# Altium PCB PCB1.PcbDoc
Units mil, origin at the board's own origin, x right, y up, seen from the top; angles counter-clockwise.
Board outline 1970 x 885 mil, 2 copper layers (Top Layer, Bottom Layer); 18 components, 17 nets, 64 pads, 0 vias.
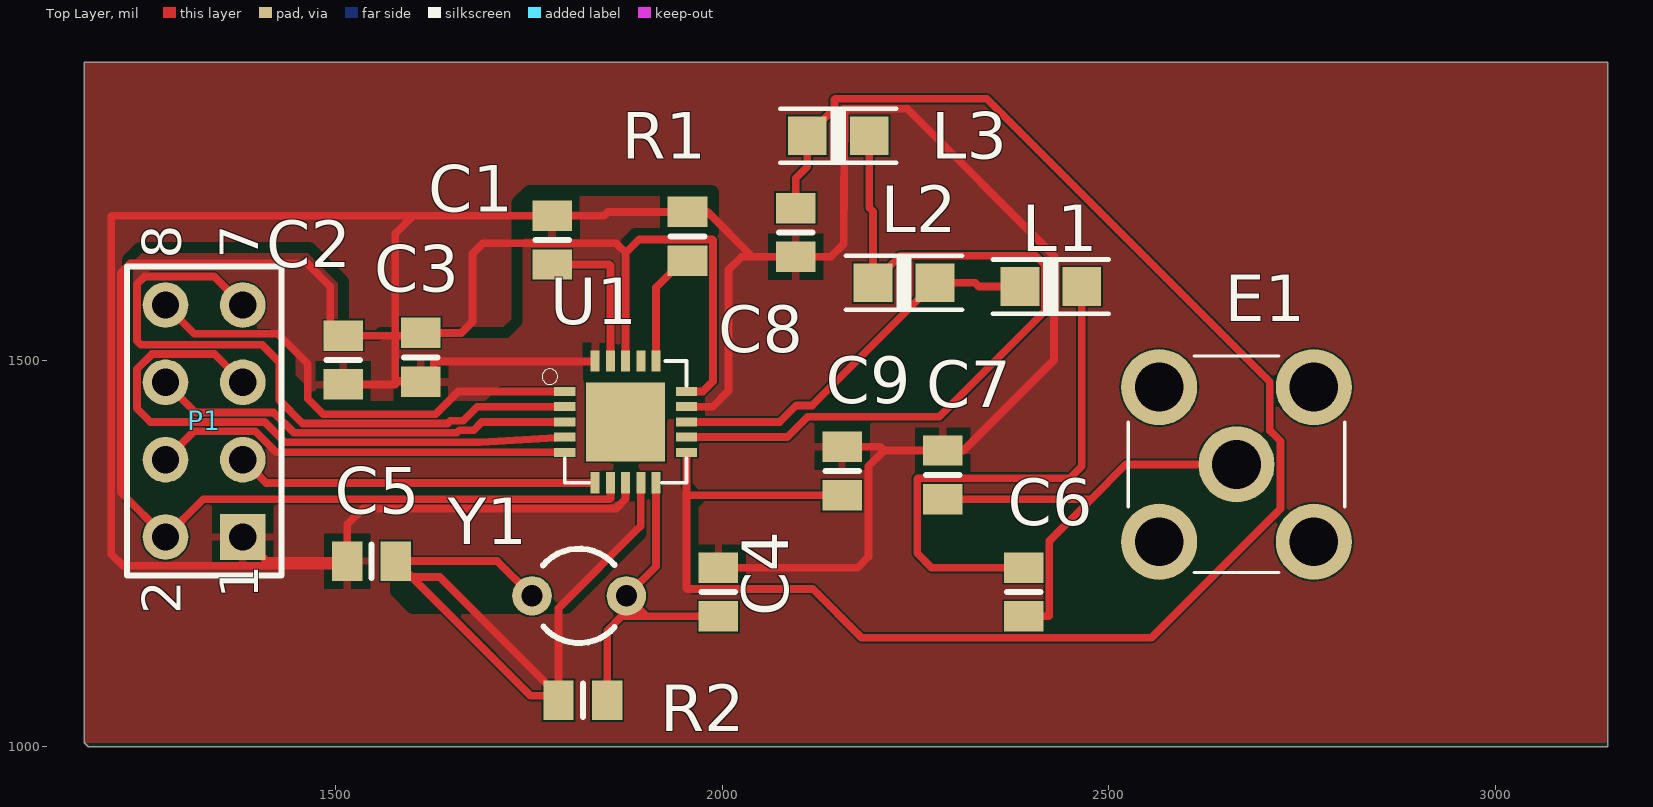
[diagram p0: Top Layer view]
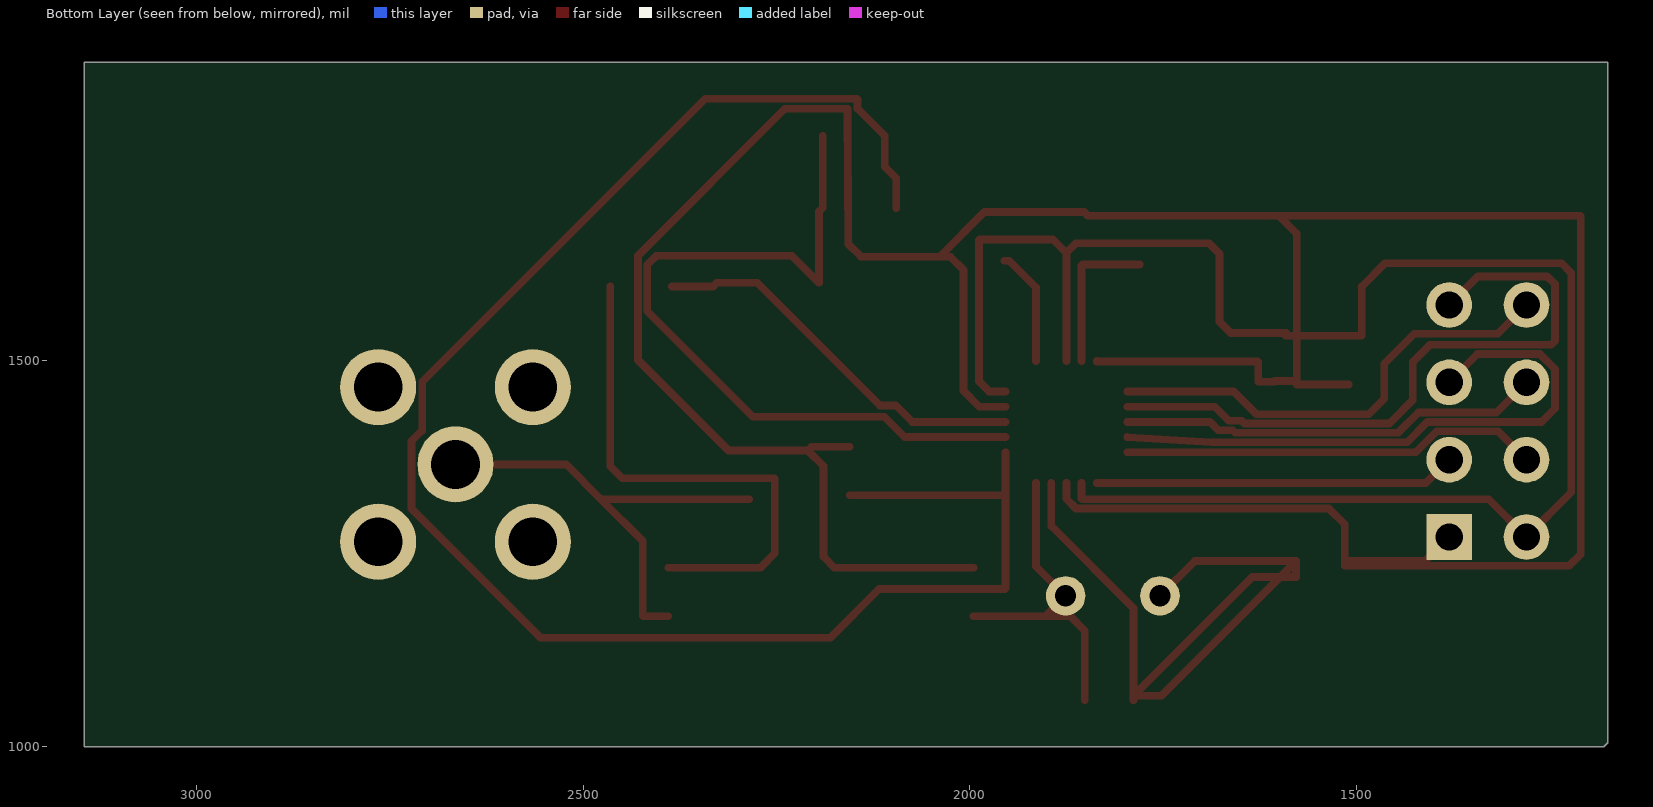
[diagram p1: Bottom Layer view, seen from below]

## Layer stack, top to bottom
Top Solder: solder mask 0.4, Solder Resist, Dk 3.5
Top Layer: signal copper 1.4
Dielectric 1: dielectric 12.6, FR-4, Dk 4.8
Bottom Layer: signal copper 1.4
Bottom Solder: solder mask 0.4, Solder Resist, Dk 3.5

## Board outline
1175,1005 1180,1000 3145,1000 3145,1885 1175,1885

## Design rules (kind name [scope] priority, off if disabled: settings)
Clearance [All] p1: gap=2 ignorepadtopadclearanceinfootprint=FALSE
PolygonConnect [All] p1: connectstyle=Relief reliefconductorwidth=10 reliefentries=4 polygonreliefangle="90 Angle" airgapwidth=10
RoutingVias [All] p1: holewidth=28 width=50 viastyle="Through Hole" minholewidth=28 minwidth=50 maxholewidth=28 maxwidth=50
SolderMaskExpansion [All] p1: expansion=4
Width [All] p1: maxlimit=10 minlimit=10 preferedwidth=10
30 further rules are at their usual default settings.

## Components (designator, comment, footprint, x,y, rotation, side; value= is the part's Value field where it differs from the comment)
C1 "Cap" 6-0805_L 1780,1655 r90 top value=33nF
C2 "Cap" 6-0805_L 1510,1500 r90 top value=10nF
C3 "Cap" 6-0805_L 1610,1503.5 r90 top value=1nF
C4 "Cap" 6-0805_L 1995,1200 r270 top value=22pF
C5 "Cap" 6-0805_L 1546.5,1240 r0 top value=22pF
C6 "Cap" 6-0805_L 2390,1200 r270 top value=1.5pF
C7 "Cap" 6-0805_L 2285,1351.5 r270 top value=1pF
C8 "Cap" 6-0805_L 2095,1665 r90 top value=2.2nF
C9 "Cap" 6-0805_L 2155,1356.5 r270 top value=4.7pF
E1 "Antenna" ANT_SMA_RP_FEMEA_90G 2665,1365 r0 top
L1 "Inductor" 0805IND 2425,1595 r0 top value=3.9nH
L2 "Inductor" 0805IND 2235,1600 r0 top value=8.2nH
L3 "Inductor" 0805IND 2150,1790 r180 top value=2.7nH
P1 "Header 8" HDR2X4 1380,1271.18 r90 top
R1 "Res1" 6-0805_L 1955,1660 r90 top value=22K
R2 "Res1" 6-0805_L 1819.68,1060 r180 top value=1M
U1 "MOUDLE-NRF24L01+(QFN20)" *QFN20G-0.5-4X4MM_MOUDLE-NRF24L01+(QFN20)(Primary) 1875,1420 r0 top
Y1 "16MHz" R38 1815,1195 r270 top

## Footprints (in the part's own frame and the unit in brackets; to place one, negate y for a bottom-side part, rotate by r counter-clockwise, add the part's x,y. Pads: shape width x height; smd on the part's side, far side on the other; paste and mask are expansions set on the pad)
6-0805_L [mm] "Chip Resistor, Body 2.0x1.2mm, IPC High Density"
  rect 1x1.3 smd: 1(-0.8,0) 2(0.8,0)
  silkscreen extent 0,-0.55 0,0.55, body extent -1.07,-0.7 1.07,0.7, height 0.7
0805IND [mil]
  rect 50x50 smd: 1(-40,0) 2(40,0)
  silkscreen extent -75,-35 75,35, body extent -40,-25 38,25, height 31
*QFN20G-0.5-4X4MM_MOUDLE-NRF24L01+(QFN20)(Primary) [mm]
  rect 0.7x0.3 smd: 1(-2,1) 2(-2,0.5) 3(-2,0) 4(-2,-0.5) 5(-2,-1) 11(2,-1) 12(2,-0.5) 13(2,0) 14(2,0.5) 15(2,1)
  rect 0.3x0.7 smd: 6(-1,-2) 7(-0.5,-2) 8(0,-2) 9(0.5,-2) 10(1,-2) 16(1,2) 17(0.5,2) 18(0,2) 19(-0.5,2) 20(-1,2)
  rect 2.6x2.6 smd: PAD(0,0)
  silkscreen extent -2.74,-2 2,2
ANT_SMA_RP_FEMEA_90G [mm] "SMA Right Angle Thru Hole Jack PCB Connector"
  round 2.5 hole 1.6: 1(-2.54,-2.54) 2(2.54,-2.54) 3(2.54,2.54) 4(-2.54,2.54) 5(0,0)
  silkscreen extent -3.56,-3.56 3.56,3.56
HDR2X4 [mm] "Connector; Header; 4x2 Position"
  rect 1.5x1.5 hole 0.9: 1(0,0)
  round 1.5 hole 0.9: 2(0,2.54) 3(2.54,0) 4(2.54,2.54) 5(5.08,0) 6(5.08,2.54) 7(7.62,0) 8(7.62,2.54)
  silkscreen extent -1.27,-1.27 8.89,3.81
R38 [mm] "Crystal, Thru-Hole; 2 Leads; Body 3.1 x 8.2 mm (Dia.xH)"
  round 1.3 hole 0.7: 1(0,1.55) 2(0,-1.55)
  silkscreen extent -1.55,-1.19 1.55,1.17

## Part data
C1 C2 C3 C4 C5 C6 C7 C8 C9: "Capacitor", LatestRevisionDate=17-Jul-2002, LatestRevisionNote="Re-released for DXP Platform.", PackageDescription="Radial Cap, Thru-Hole; 2 Leads; 0.3 in Pin Spacing", PackageReference=RAD-0.3, Published=8-Jun-2000, Publisher="Altium Limited"
E1: "Generic Antenna", LatestRevisionDate=17-Jul-2002, LatestRevisionNote="Re-released for DXP Platform.", PackageReference=PIN1, Published=24-Mar-1999, Publisher="Altium Limited"
P1: "Header, 8-Pin", LatestRevisionDate=17-Jul-2002, LatestRevisionNote="Re-released for DXP Platform.", Publisher="Altium Limited"
R1 R2: "Resistor", LatestRevisionDate=17-Jul-2002, LatestRevisionNote="Re-released for DXP Platform.", PackageDescription="Axial Device, Thru-Hole; 2 Leads; 0.3 in Pin Spacing", PackageReference=AXIAL-0.3, Published=8-Jun-2000, Publisher="Altium Limited"
U1: Package="SMD-8 Seeed Studio", Availability=Unavailable, MF="Seeed Technology", MP=NRF24L01+MODULE, Price=None, SnapEDA_Link=https://www.snapeda.com/parts/NRF24L01%2BMODULE/Seeed%20Technology%20Co.%2C%20Ltd/view-part/?ref=snap
Y1: library part XTAL, "Crystal Oscillator", LatestRevisionDate=17-Jul-2002, LatestRevisionNote="Re-released for DXP Platform.", PackageDescription="Crystal, Thru-Hole; 2 Leads; Body 3.1 x 8.2 mm (Dia.xH)", PackageReference=R38, Published=8-Jun-2000, Publisher="Altium Limited"
L1 L2 L3: Code_IEC=1005, Code_JEITA=0402, LatestRevisionDate=29-May-2009, LatestRevisionNote="IPC-7351 Footprint Added.", PackageDescription="Chip Inductor", PackageReference=0402-A, Published=8-Jun-2000, Publisher="Altium Limited"

## Nets (pads, with @x,y where several pads share a name; then routed paths per layer and width w, separated by ;. In a path a pad name is that pad's centre, name@x,y a point inside that pad or via, vN(x,y) a via of type N, cw(c..) or ccw(c..) an arc to the next point about the centre after c; other vN are vias at no path point)
CE: P1.8 U1.1 | length 613.4
  Top Layer w10: P1.8 1317.18,1534 1425,1534 1463.99,1495.01 1463.99,1450 1484.17,1429.82 1629.15,1429.82 1658.7,1459.37 U1.1
CSN: P1.7 U1.2 | length 864.9
  Top Layer w10: P1.7 1343.18,1608 1253,1608 1243,1598 1243,1525 1248.29,1519.71 1404.79,1519.71 1427,1497.5 1427,1448.3 1457.48,1417.82 1644.66,1417.82 1648.16,1421.32 1664.97,1421.32 1683.34,1439.69 U1.2
GND: C1.2 C2.1 C3.1 C4.1 C5.1 C7.1 C8.1 C9.1 P1.1 R1.2 U1.8 U1.14 U1.20 | length 4491
  Top Layer w10: P1.1 1411.18,1240 C5.1 ; C2.1 1577,1468.5 1577,1473.01 ; U1.20 1835.63,1498 1628,1498 1627,1497 1627,1472.01 C3.1 1606.5,1472.01 1605.5,1473.01 1577,1473.01 ; U1.8 1875,1320.5 1862.5,1308 1535.5,1308 1515,1287.5 C5.1 ; U1.14 1987.5,1439.69 2008,1460.19 2008,1616.5 2025,1633.5 2039,1633.5 ; C4.1 2175,1231.5 2189,1245.5 2189,1362.5 2209.49,1382.99 ; C9.1 2204.49,1387.99 2209.49,1382.99 ; C5.1 1515,1234 1225,1234 1210,1249 1210,1686 1210.5,1686.5 1600,1686.5 ; 1577,1473.01 1577,1663.5 1600,1686.5 ; 1600,1686.5 C1.2 1846.99,1686.5 1851.99,1691.5 R1.2 1981.01,1691.5 2039,1633.5 ; 2039,1633.5 C8.1 2140.5,1633.5 2157,1650 2158,1825 2239,1825 2429,1635 2429,1499.99 2312,1382.99 C7.1 2209.49,1382.99
IRQ: P1.3 U1.6 | length 468.4
  Top Layer w10: P1.3 1410.18,1341 1835.63,1341 U1.6
MISO: P1.4 U1.5 | length 542.8
  Top Layer w10: P1.4 1316.82,1408 1396.02,1408 1423.39,1380.63 U1.5
MOSI: P1.5 U1.4 | length 782.5
  Top Layer w10: P1.5 1343.47,1507.71 1262.5,1507.71 1243,1488.21 1243,1437.5 1260.5,1420 1408.02,1420 1434.2,1393.82 1687.09,1393.82 U1.4
NetC1_1: C1.1 U1.19 | length 199.3
  Top Layer w10: C1.1 1854,1623.5 1855.32,1622.19 U1.19
NetC4_2: C4.2 R2.1 U1.10 Y1.1 | length 441.1
  Top Layer w10: R2.1 1851.18,1150 1869.69,1168.5 1902.52,1168.5 ; U1.10 1914.37,1233.35 Y1.1 1902.52,1168.5 ; C4.2 1902.52,1168.5
NetC5_2: C5.2 R2.2 U1.9 Y1.2 | length 1096.6
  Top Layer w10: Y1.2 1708.98,1240 C5.2 ; R2.2 R2.2@1788.19,1066 ; U1.9 1894.69,1285.5 1788.19,1179 R2.2@1788.19,1066 ; C5.2 1598.58,1219.41 ; C5.2 1577.99,1219.41 1598.58,1219.41 ; 1598.58,1219.41 1634.78,1219.41 R2.2@1788.19,1066 ; 1598.58,1219.41 1751.99,1066 R2.2@1788.19,1066
NetC6_1: C6.1 L1.2 | length 694
  Top Layer w10: C6.1 2270.5,1231.5 2252,1250 2252,1346 2253,1347 2449.5,1347 2465,1362.5 L1.2
NetC6_2: C6.2 C7.2 E1.5 | length 604.9
  Top Layer w10: C7.2 2477,1320 ; C6.2 2422,1168.5 2423,1169.5 2423,1266 2477,1320 ; E1.5 2522,1365 2477,1320
NetC8_2: C8.2 C9.2 L3.2 U1.11 | length 2286.9
  Top Layer w10: U1.11 1953.74,1325 ; C8.2 2095,1735 2110,1750 L3.2 2145,1825 2145,1837 2146,1838 2342,1838 2708,1472 2708,1409 2722,1395 2722,1308 2555,1141 2180,1141 2117,1204 1954.74,1204 1953.74,1205 1953.74,1325 ; C9.2 1953.74,1325
NetL1_1: L1.1 L2.2 U1.13 | length 507.9
  Top Layer w10: U1.13 2074.41,1420 2095.75,1441.34 2116.34,1441.34 L2.2 2327,1600 2332,1595 L1.1
NetL2_1: L2.1 L3.1 U1.12 | length 1024.2
  Top Layer w10: U1.12 2084.05,1400.32 2110.41,1426.68 2280.68,1426.68 2417,1563 2417,1623 2405,1635 2230,1635 L2.1 2195,1692 2190,1697 L3.1
NetR1_1: R1.1 U1.16 | length 150.1
  Top Layer w10: U1.16 1914.37,1593.87 1949,1628.5 R1.1
SCK: P1.6 U1.3 | length 549.2
  Top Layer w10: P1.6 1319.18,1432 1420.02,1432 1446.2,1405.82 1656.66,1405.82 1660.16,1409.32 1678.59,1409.32 1689.27,1420 U1.3
VCC: C2.2 C3.2 P1.2 U1.7 U1.15 U1.18 | length 2306.6
  Top Layer w10: U1.7 1855.32,1321 1854.32,1320 1328.82,1320 P1.2 1222,1329.18 1222,1612.5 1234.5,1625 1463,1625 1493,1595 1493,1531.5 C2.2 1591,1531.5 1591,1535 C3.2 1662.5,1535 1677,1549.5 1677,1637.5 1690.5,1651 1862.5,1651 1875,1638.5 ; U1.18 1875,1638.5 ; U1.15 1975,1459.37 1988,1472.37 1988,1655 1987,1656 1892.5,1656 1875,1638.5
pads on no net: E1.1 E1.2 E1.3 E1.4 U1.17 U1.PAD

## Polygon pours and split planes (outlines as drawn)
GND on Top Layer "GND_L01_P000" (solid, remove dead copper, pour order 0): 1175,1885 1175,1005 3140,1005 3145,1000 3145,1885

## Silkscreen, mask and mechanical layers (free items; w line width, h text height)
Mechanical 13:
  circle w10: c1310,1090 r54.08
  circle w10: c3035,1100 r55.23
  circle w10: c3040,1785 r39.05
  circle w10: c1290,1780 r40
  lines w10: 1175,1005 1175,1885 3145,1885 3145,1000 1180,1000 1175,1005

## Text inside footprints (layer, text, board x,y; h text height)
P1: Top Overlay "8" at 1300,1631.18 h50 r90; Top Overlay "7" at 1400,1631.18 h50 r90; Top Overlay "1" at 1400,1191.18 h50 r90; Top Overlay "2" at 1300,1171.18 h50 r90